# Altium PCB ANN.PcbDoc
Units mil, origin at the board's own origin, x right, y up, seen from the top; angles counter-clockwise.
Board outline 4785 x 5445 mil, 2 copper layers (Top Layer, Bottom Layer); 37 components, 36 nets, 145 pads, 0 vias.
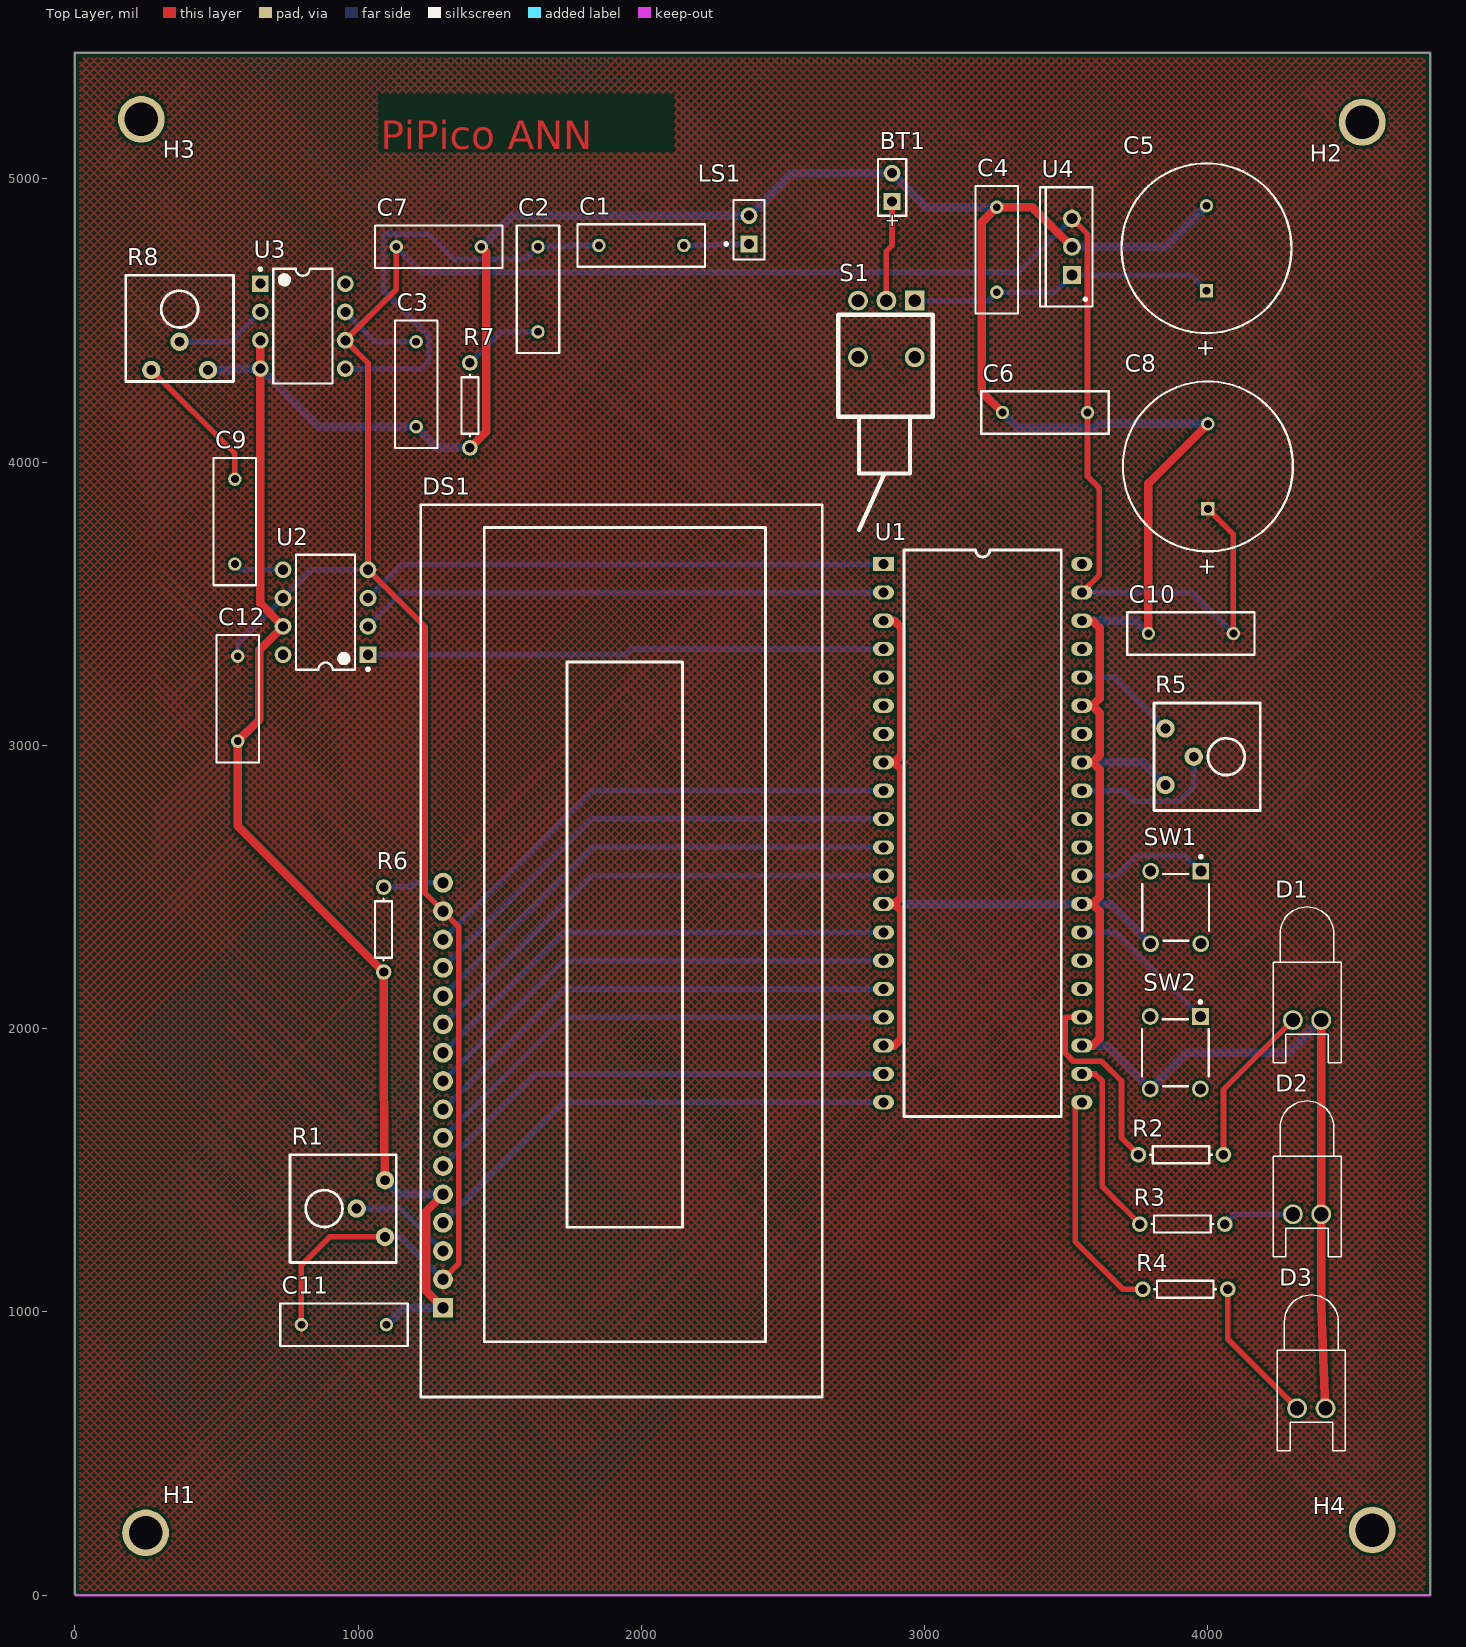
[diagram p0: Top Layer view]
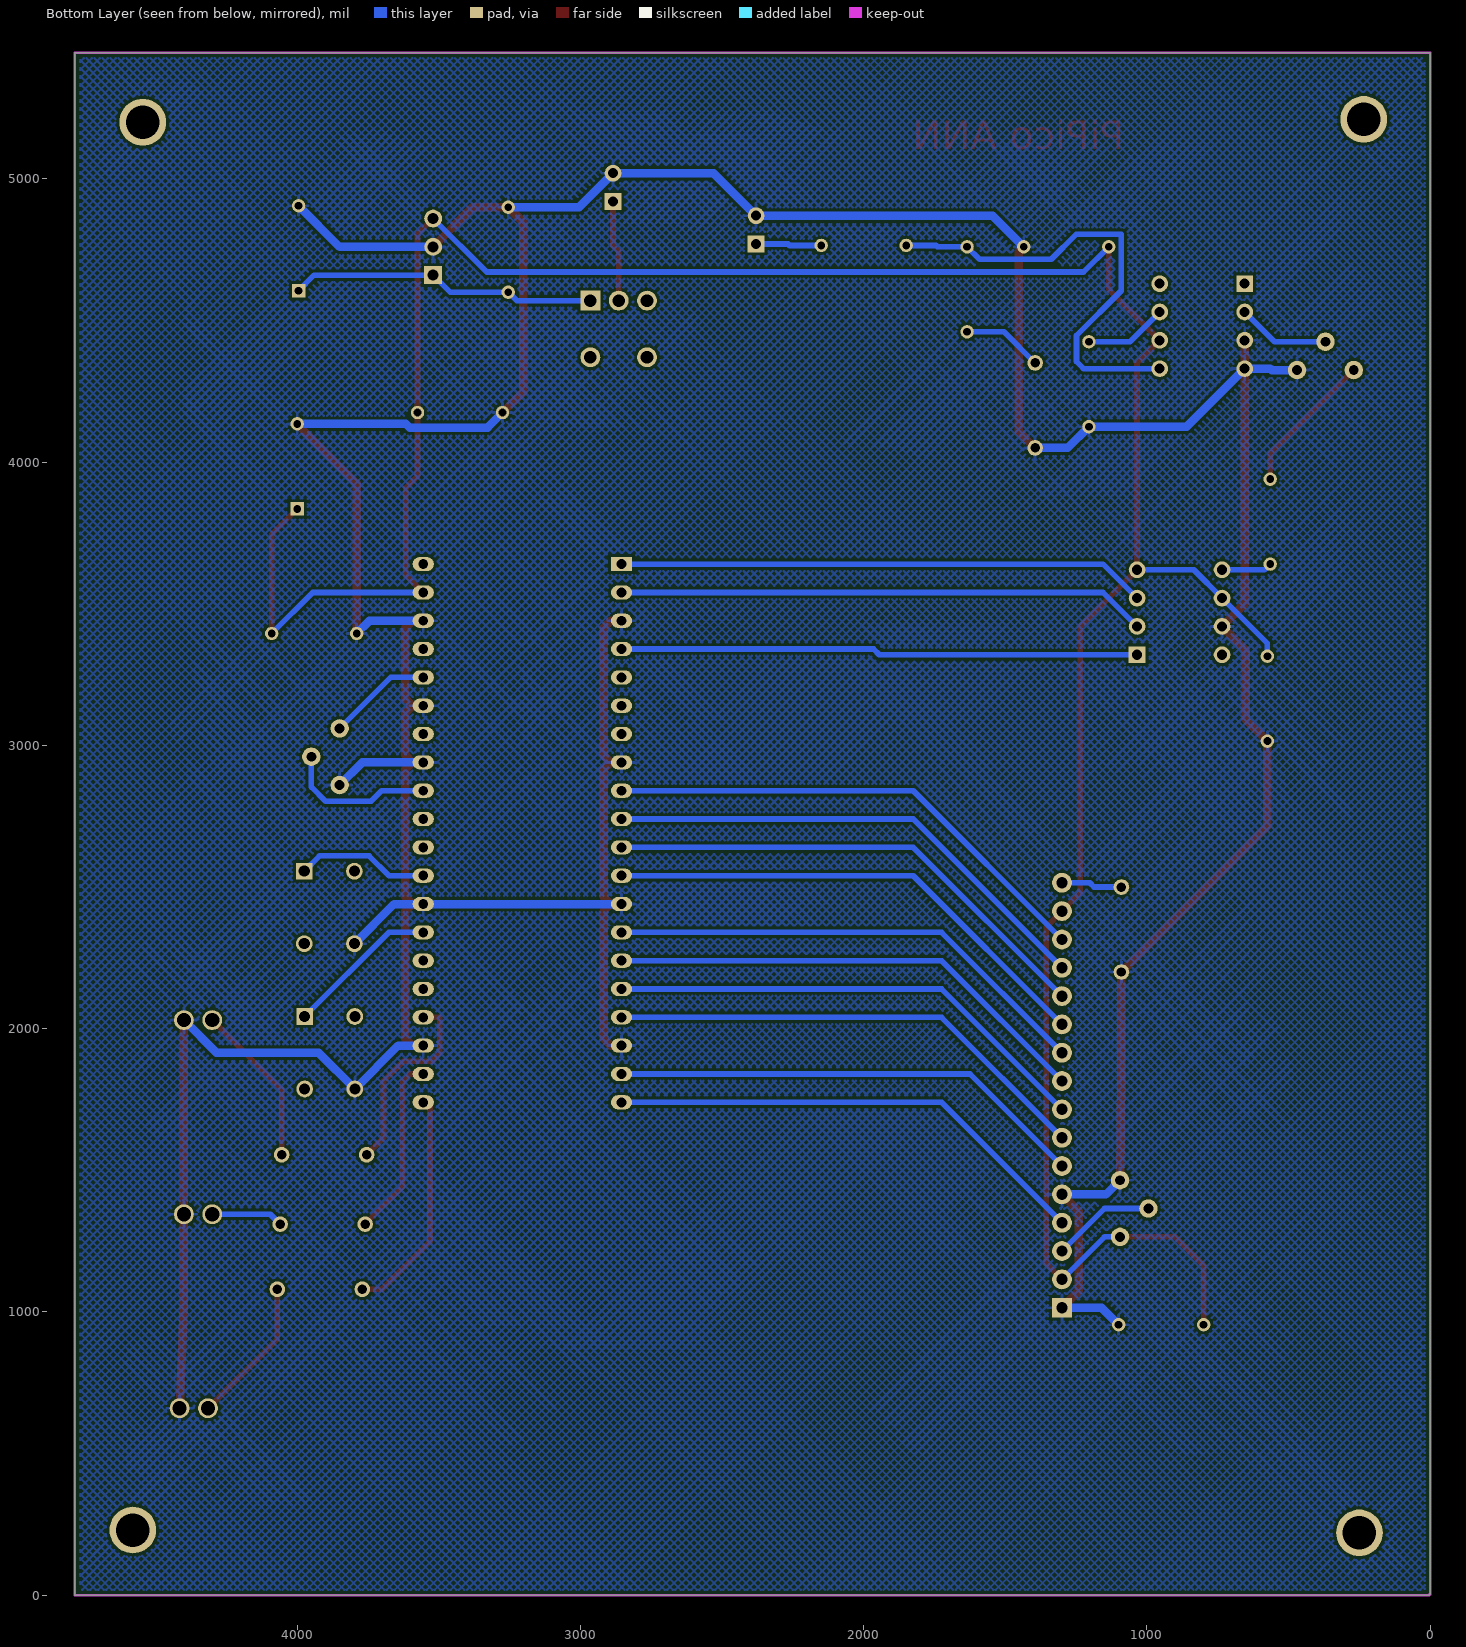
[diagram p1: Bottom Layer view, seen from below]

## Layer stack, top to bottom
Top Solder: solder mask 0.4, Solder Resist, Dk 3.5
Top Layer: signal copper 1.4
Dielectric 1: dielectric 12.6, FR-4, Dk 4.8
Bottom Layer: signal copper 1.4
Bottom Solder: solder mask 0.4, Solder Resist, Dk 3.5

## Board outline
0,215 0,330 0,5445 4785,5445 4785,0 5,0 0,5

## Design rules (kind name [scope] priority, off if disabled: settings)
Clearance [All] p1: gap=10 ignorepadtopadclearanceinfootprint=FALSE except(0: Arc-Hole Track-Hole SMDPad-Hole THPad-Hole Via-Hole Fill-Hole Poly-Hole Region-Hole Text-Hole)
PolygonConnect [All] p1: connectstyle=Relief reliefconductorwidth=10 reliefentries=4 polygonreliefangle="90 Angle" airgapwidth=10
RoutingVias [All] p1: holewidth=28 width=50 viastyle="Through Hole" minholewidth=28 minwidth=50 maxholewidth=28 maxwidth=50
SolderMaskExpansion [All] p1: expansion=4 istentingtop=FALSE
Width "Schematic Width Constraint" [InNet('GND')] p1: maxlimit=30 minlimit=30 preferedwidth=30
Width [All] p2: maxlimit=20 minlimit=20 preferedwidth=20
30 further rules are at their usual default settings.

## Components (designator, comment, footprint, x,y, rotation, side; value= is the part's Value field where it differs from the comment)
BT1 "Battery" BAT-2 2885,4970 r90 top
C1 "Cap" RAD-0.3 2000,4765 r180 top value=250uF
C2 "Cap" RAD-0.3 1635,4610 r90 top value=.05uF
C3 "Cap" RAD-0.3 1205,4275 r90 top value=10uF
C4 "Cap" RAD-0.3 3255,4750 r270 top value=100nF
C5 "Cap Pol1" RB7.6-15 3995,4755 r270 top value=100uF
C6 "Cap" RAD-0.3 3425,4175 r0 top value=100nF
C7 "Cap" RAD-0.3 1285,4760 r180 top value=100nF
C8 "Cap Pol1" RB7.6-15 4000,3985 r270 top value=100uF
C9 "Cap" RAD-0.3 565,3790 r90 top value=0.1uF
C10 "Cap" RAD-0.3 3940,3395 r0 top value=100nF
C11 "Cap" RAD-0.3 950,955 r180 top value=100nF
C12 "Cap" RAD-0.3 575,3165 r90 top value=100nF
D1 "RED" LED-0 4350,2030 r180 top
D2 "GREEN" LED-0 4350,1345 r180 top
D3 "YELLOW" LED-0 4365,660 r180 top
DS1 "LCD 44780" "OLED 16x2" 1300,1015 r90 top
H1 "Hole 3mm" "Hole 3mm" 250,220 r0 top
H2 "Hole 3mm" "Hole 3mm" 4545,5200 r0 top
H3 "Hole 3mm" "Hole 3mm" 235,5210 r0 top
H4 "Hole 3mm" "Hole 3mm" 4580,230 r0 top
LS1 "Speaker" PIN2 2380,4770 r90 top
R1 "RPot_2" "POT OFFSET 100_1" 1095,1265 r90 top value=10K
R2 "Res1" AXIAL-0.3 3905,1555 r0 top value=330
R3 "Res1" AXIAL-0.3 3910,1310 r0 top value=330
R4 "Res1" AXIAL-0.3 3920,1080 r0 top value=330
R5 "RPot_2" "POT OFFSET 100_1" 3850,3060 r270 top value=10K
R6 "Res1" AXIAL-0.3 1090,2350 r270 top value=1000
R7 "Res1" AXIAL-0.3 1395,4200 r90 top value=10
R8 "RPot_2" "POT OFFSET 100_1" 270,4325 r0 top value=10K
S1 "SW-SPDT" "SW DPST jameco" 2867.36,4571.89 r0 top
SW1 "1825910-6" TECO-1825910-6_V 3886.42,2427.95 r270 top
SW2 "1825910-6" TECO-1825910-6_V 3885,1915 r270 top
U1 "Raspberry Pi Pico" "Raspberry Pi Pico" 2855,3640 r0 top
U2 "LT1661" DIP-8 885,3470 r180 top
U3 "LM386N-1" DIP-8 805,4480 r0 top
U4 "LM2940CT-5.0" T03B 3520,4760 r90 top

## Footprints (in the part's own frame and the unit in brackets; to place one, negate y for a bottom-side part, rotate by r counter-clockwise, add the part's x,y. Pads: shape width x height; smd on the part's side, far side on the other; paste and mask are expansions set on the pad)
AXIAL-0.3 [mm] "Axial Device, Thru-Hole; 2 Leads; 0.3 in Pin Spacing"
  round 1.4 hole 0.85: 1(-3.81,0) 2(3.81,0)
  silkscreen extent -2.77,-0.76 2.77,0.76
BAT-2 [mm] "Battery; 2 Leads"
  rect 1.5x1.5 hole 0.9: 1(-1.27,0)
  round 1.5 hole 0.9: 2(1.27,0)
  silkscreen extent -2.54,-1.27 2.54,1.27
DIP-8 [mm]
  rect 1.5x1.5 hole 0.9: 1(-3.81,3.81)
  round 1.5 hole 0.9: 2(-3.81,1.27) 3(-3.81,-1.27) 4(-3.81,-3.81) 5(3.81,-3.81) 6(3.81,-1.27) 7(3.81,1.27) 8(3.81,3.81)
  silkscreen extent -3.94,-5.15 2.65,5.23, body extent -3.6,-5.15 3.6,5.15, height 5.08
"Hole 3mm" [mil]
  round 165 hole 118.11: 1(0,0)
LED-0 [mil] "LED; 2 Leads"
  round 70 hole 50: 1(50,0) 2(-50,0)
  silkscreen extent -120,-400 120,150
"OLED 16x2" [mil]
  rect 70x70 hole 40: 1(0,0)
  round 70 hole 40: 2(100,0) 3(200,0) 4(300,0) 5(400,0) 6(500,0) 7(600,0) 8(700,0) 9(800,0) 10(900,0) 11(1000,0) 12(1100,0) 13(1200,0) 14(1300,0) 15(1400,0) 16(1500,0)
  silkscreen extent -315,-1339 2835,79
PIN2 [mm] "Photosensitive Diode; 2 Leads"
  rect 1.5x1.5 hole 0.9: 1(0,0)
  round 1.5 hole 0.9: 2(2.54,0)
  silkscreen extent -1.4,-1.4 3.94,2.17
"POT OFFSET 100_1" [mil]
  round 65 hole 35: 1(0,0) 2(100,100) 3(200,0)
  silkscreen extent -90,-40 290,335
RAD-0.3 [mm] "Radial Cap, Thru-Hole; 2 Leads; 0.3 in Pin Spacing"
  round 1.2 hole 0.7: 1(-3.81,0) 2(3.81,0)
  silkscreen extent -5.71,-1.91 5.71,1.91
"Raspberry Pi Pico" [mil]
  rect 75x50 hole 35: 1(0,0)
  oval 75x50 hole 35: 2(0,-100) 3(0,-200) 4(0,-300) 5(0,-400) 6(0,-500) 7(0,-600) 8(0,-700) 9(0,-800) 10(0,-900) 11(0,-1000) 12(0,-1100) 13(0,-1200) 14(0,-1300) 15(0,-1400) 16(0,-1500) 17(0,-1600) 18(0,-1700) 19(0,-1800) 20(0,-1900) 21(700,-1900) 22(700,-1800) 23(700,-1700) 24(700,-1600) 25(700,-1500) 26(700,-1400) 27(700,-1300) 28(700,-1200) 29(700,-1100) 30(700,-1000) 31(700,-900) 32(700,-800) 33(700,-700) 34(700,-600) 35(700,-500) 36(700,-400) 37(700,-300) 38(700,-200) 39(700,-100) 40(700,0)
  silkscreen extent 72,-1950 628,50
RB7.6-15 [mm] "Polarized Capacitor (Radial); 2 Leads"
  rect 1.2x1.2 hole 0.7: 1(3.81,0)
  round 1.2 hole 0.7: 2(-3.81,0)
  silkscreen extent -7.62,-7.62 7.62,7.62
"SW DPST jameco" [mil]
  rect 70x70 hole 45: 1(97.64,-1.89)
  round 70 hole 45: 2(-2.36,-1.89) 3(-102.36,-1.89) 4(-102.36,-201.89) 5(97.64,-201.89)
  silkscreen extent -172,-812 162,-52
T03B [mm]
  rect 1.6x1.6 hole 1: 1(-2.54,0)
  round 1.6 hole 1: 2(0,0) 3(2.54,0)
  silkscreen extent -5.35,-1.85 5.35,2.85, body extent -5.4,-1.9 5.4,2.9, height 19.4
TECO-1825910-6_V [mm] "Switch, 4-Leads, Body 5.99x5.99mm"
  rect 1.5x1.5 hole 0.99: 1(-3.25,2.25)
  round 1.5 hole 0.99: 2(3.25,2.25) 3(-3.25,-2.25) 4(3.25,-2.25)
  silkscreen extent -4.67,-2.99 2.99,2.99, body extent -3,-2.99 2.99,3, height 5

## Part data
BT1: "Multicell Battery", LatestRevisionDate=17-Jul-2002, LatestRevisionNote="Re-released for DXP Platform.", PackageDescription="Battery; 2 Leads", PackageReference=BAT-2, Published=24-Mar-1999, Publisher="Altium Limited"
C1 C2 C3 C4 C6 C7 C9 C10 C11 C12: "Capacitor", LatestRevisionDate=17-Jul-2002, LatestRevisionNote="Re-released for DXP Platform.", PackageDescription="Radial Cap, Thru-Hole; 2 Leads; 0.3 in Pin Spacing", PackageReference=RAD-0.3, Published=8-Jun-2000, Publisher="Altium Limited"
C5 C8: "Polarized Capacitor (Radial)", LatestRevisionDate=17-Jul-2002, LatestRevisionNote="Re-released for DXP Platform.", PackageDescription="Polarized Capacitor (Radial); 2 Leads", PackageReference=RB7.6-15, Published=8-Jun-2000, Publisher="Altium Limited"
D1 D2 D3: library part LED0, "Typical INFRARED GaAs LED", LatestRevisionDate=08-Jul-2005, LatestRevisionNote="Mech Layer 1 removed.", PackageDescription="LED; 2 Leads", PackageReference=LED-0, Published=8-Jun-2000, Publisher="Altium Limited"
LS1: "Loudspeaker", LatestRevisionDate=17-Jul-2002, LatestRevisionNote="Re-released for DXP Platform.", PackageReference=PIN2, Published=24-Mar-1999, Publisher="Altium Limited"
R1 R5 R8: library part RPot_5, "Potentiometer", LatestRevisionDate=17-Jul-2002, LatestRevisionNote="Re-released for DXP Platform.", PackageDescription="Variable Resistor, Thru-Hole; 3 Leads", PackageReference=VR5, Published=8-Jun-2000, Publisher="Altium Limited", Set Position=0.5, Sim Note="Enter the Resistance value and the set point into parameter fields."
R2 R3 R4 R6 R7: "Resistor", LatestRevisionDate=17-Jul-2002, LatestRevisionNote="Re-released for DXP Platform.", PackageDescription="Axial Device, Thru-Hole; 2 Leads; 0.3 in Pin Spacing", PackageReference=AXIAL-0.3, Published=8-Jun-2000, Publisher="Altium Limited"
S1: "SPDT Subminiature Toggle Switch, Right Angle Mounting, Vertical Actuation", ComponentLink1Description="Manufacturer Link", ComponentLink1URL=http://www.apem.com, DatasheetVersion=05-Dec-2000, LatestRevisionDate=17-Dec-2003, LatestRevisionNote="Schematic revised, PCB Footprint replaced.", PackageDescription="Switch; 4 Leads", PackageReference=TL36WW15050, Published=24-Mar-1999, Publisher="Altium Limited"
SW1 SW2: library part CMP-1684-00021-1, "Tact Switch, SPST-NO, 0.05 A, -35 to 85 degC, 4-Pin THD, RoHS, Bulk", Actuator Color=Black, Contact Rating @ Voltage=0.05A@24VDC, Dielectric Strength=500VAC, Manufacturer="TE Connectivity", Maximum AC Voltage Rating=N/A, Maximum Contact Resistance=100mOhm, Maximum DC Voltage Rating=24V, Minimum Insulation Resistance=100MOhm, Operating Temperature=-35to85C, Package Description="4-Pin Through Hole Device, Body 5.99 x 5.99 mm, Pitch 6.5 mm", Package Reference=THD, Actuator Length=1.4mm, Actuator Material=PolybutyleneTerephthalate, Actuator Style=RoundButton, Base Material=N/A, Body Orientation=Straight, Bushing Type=Unthreaded, Contact Material=CopperAlloy, Contact Plating=Silver, Datasheet URL=http://www.te.com/commerce/DocumentDelivery/DDEController?Action=showdoc&DocId=Customer+Drawing%7F1825910%7FC9%7Fpdf%7FEnglish%7FENG_CD_1825910_C9.pdf%7F1825910-6, Datasheet Version="Rev. C9", Dimension=5.99x5mm, Electrical Life=100000Cycles, Family=1825910, Function=MomentaryContact, Housing Material=N/A, Illumination=N/R, Manufacturer URL=http://www.te.com, Mechanical Life=100000Cycles, Mounting=ThroughHole, Packaging=N/A, Part No=1825910-6, Pole Throw Configuration=SPST, Product Weight=N/A, RoHS=Yes, Seal Description=N/A, Seal Location=N/A, Switch Configuration=OFF(ON), Terminal Type=PCPins, Thread Size=N/R
U3: "Low-Voltage Audio Power Amplifier", PackageDocument=Sep-1997, DatasheetDocument=Sep-1997, PackageReference=N08E, Published=15-Apr-2002, Publisher="Altium Limited"
U4: library part LM2940CT-5.0_1, "1A Low Dropout Regulator, 3-pin TO-220", Manufacturer="National Semiconductor", PackageTopMarking="NSUZXYTTE#*LM2940CT*-5.0 P+", PowerWise=N, ComponentLink1Description="Manufacturer URL", ComponentLink1URL=http://www.national.com/, ComponentLink2Description="LM2940C Datasheet", ComponentLink2URL=http://www.national.com/ds/LM/LM2940C.pdf, ComponentLink3Description="LM2940C Web Page", ComponentLink3URL=http://www.national.com/pf/LM/LM2940C.html, ComponentLink4Description="T03B Package Page", ComponentLink4URL=http://www.national.com/packaging/folders/t03b.html, CompType="LDO IC", DatasheetVersion=Jan-2007, High-Reliability=Y, PackageDescription="TO-220, Molded, 3 Lead, Straight", PackageReference=T03B, PackageVersion="revL, Jan-1992", PartNumber=LM2940CT-5.0, PinCount=3, RoHS=N

## Nets (pads, with @x,y where several pads share a name; then routed paths per layer and width w, separated by ;. In a path a pad name is that pad's centre, name@x,y a point inside that pad or via, vN(x,y) a via of type N, cw(c..) or ccw(c..) an arc to the next point about the centre after c; other vN are vias at no path point)
+5: C6.2 C7.2 C8.1 C10.2 C11.2 C12.2 DS1.2 DS1.15 R1.1 U1.39 U2.4 U2.6 U3.6 U4.3 | length 10292.6
  Top Layer w20: C11.2 800,1165 900,1265 R1.1 ; C7.2 1135,4610 U3.6 1035,4350 U2.4 1236,3419 1236,2479 DS1.15 1355,2360 1355,1170 DS1.2 ; U4.3 3575,4805 C6.2 3575,3950 3617,3908 3617,3602 U1.39 ; C8.1 4090,3745 C10.2
  Bottom Layer w20: C12.2 575,3360 U2.6 835,3620 U2.4 ; R1.1 1150,1265 DS1.2 ; C7.2 1224,4671 3331,4671 U4.3 ; U1.39 3945,3540 C10.2
AI1: R5.2 U1.32 | length 538
  Bottom Layer w20: U1.32 3702,2840 3739,2803 3900,2803 3950,2853 R5.2
DACCS: U1.4 U2.1 | length 1828.3
  Bottom Layer w20: U2.1 1945,3320 1965,3340 U1.4
DACDin: U1.1 U2.3 | length 1869.7
  Bottom Layer w20: U2.3 1155,3640 U1.1
DACSCK: U1.2 U2.2 | length 1869.7
  Bottom Layer w20: U2.2 1155,3540 U1.2
DI1: SW1.1 U1.29 | length 471.4
  Bottom Layer w20: U1.29 3676,2540 3746,2610 3920.91,2610 SW1.1
DI2: SW2.1 U1.27 | length 541.6
  Bottom Layer w20: U1.27 3676.53,2340 SW2.1
DO1: R2.1 U1.24 | length 708.4
  Top Layer w20: U1.24 3497,2040 3497,1913 3525,1885 3625,1885 3695,1815 3695,1615 R2.1
DO2: R3.1 U1.22 | length 642.4
  Top Layer w20: U1.22 3602,1840 3627,1815 3627,1443 R3.1
DO3: R4.1 U1.21 | length 823.6
  Top Layer w20: U1.21 3531.25,1740 3531.25,1248.75 3700,1080 R4.1
GND: BT1.2 C3.1 C4.1 C5.2 C6.1 C7.1 C8.2 C10.1 C11.1 C12.1 D1.2 D2.2 D3.2 DS1.1 DS1.5 LS1.2 R1.3 R5.3 R6.2 R7.1 R8.3 SW1.4 SW2.4 U1.3 U1.8 U1.13 U1.18 U1.23 U1.28 U1.33 U1.35 U1.38 U2.7 U3.3 U3.4 U4.2 | length 18602.6
  Top Layer w30: U3.3 U3.4 655,3500 U2.7 652,3337 652,3092 C12.1 575,2715 R6.2 1090,1838 R1.3 ; DS1.1 1240,1075 1240,1355 DS1.5 ; R7.1 1452,4107 1452,4743 C7.1 ; U1.18 2893,1940 2918,1965 2918,2415 2893,2440 ; U1.13 2893,2440 ; U1.8 2893,2940 ; U1.3 2893,3440 2918,3415 2918,2965 2893,2940 ; C6.1 3202,4248 3202,4847 C4.1 3380,4900 U4.2 ; U1.23 3593,1940 3618,1965 3618,2415 3593,2440 ; U1.28 3593,2440 ; U1.33 3593,2940 ; U1.35 3593,3140 ; U1.38 3593,3440 3618,3415 3618,3165 3593,3140 ; C10.1 3790,3925 C8.2 ; D1.2 D2.2 4400,1018 D3.2 ; 2893,2440 2918,2465 2918,2915 2893,2940 ; 3593,2440 3618,2465 3618,2915 3593,2940 ; 3593,2940 3618,2965 3618,3115 3593,3140
  Bottom Layer w30: R8.3 560,4325 565,4330 U3.4 860,4125 C3.1 1280,4050 R7.1 ; R1.3 1145,1415 DS1.5 ; C11.1 1160,1015 DS1.1 ; C7.1 1545,4870 LS1.2 2530,5020 BT1.2 3005,4900 C4.1 ; U1.13 U1.28 3657.83,2440 SW1.4 ; C6.1 3328,4122 3603,4122 3616,4135 C8.2 ; U4.2 3850,4760 C5.2 ; U1.23 3643.47,1940 SW2.4 3924.37,1915 4285,1915 D1.2 ; U1.33 3770,2940 R5.3 ; U1.38 3745,3440 C10.1
LCDE: DS1.6 U1.19 | length 1689.6
  Bottom Layer w20: DS1.6 1625,1840 U1.19
LCDI0: DS1.7 U1.17 | length 1731
  Bottom Layer w20: DS1.7 1725,2040 U1.17
LCDI1: DS1.8 U1.16 | length 1731
  Bottom Layer w20: DS1.8 1725,2140 U1.16
LCDI2: DS1.9 U1.15 | length 1731
  Bottom Layer w20: DS1.9 1725,2240 U1.15
LCDI3: DS1.10 U1.14 | length 1731
  Bottom Layer w20: DS1.10 1725,2340 U1.14
LCDI4: DS1.11 U1.12 | length 1772.5
  Bottom Layer w20: DS1.11 1825,2540 U1.12
LCDI5: DS1.12 U1.11 | length 1772.5
  Bottom Layer w20: DS1.12 1825,2640 U1.11
LCDI6: DS1.13 U1.10 | length 1772.5
  Bottom Layer w20: DS1.13 1825,2740 U1.10
LCDI7: DS1.14 U1.9 | length 1772.5
  Bottom Layer w20: DS1.14 1825,2840 U1.9
LCDRS: DS1.4 U1.20 | length 1731
  Bottom Layer w20: DS1.4 1725,1740 U1.20
NetBT1_1: BT1.1 S1.2 | length 358.3
  Top Layer w20: S1.2 2865,4745 2885,4765 BT1.1
NetC1_1: C1.1 LS1.1 | length 232.1
  Bottom Layer w20: C1.1 2262,4765 2267,4770 LS1.1
NetC1_2: C1.2 C2.2 U3.5 | length 1634.5
  Bottom Layer w20: U3.5 1224,4330 1249,4355 1249,4447 1091,4605 1091,4804 1250,4804 1338,4716 1591,4716 C2.2 1740,4760 1745,4765 C1.2
NetC2_1: C2.1 R7.2 | length 285.6
  Bottom Layer w20: R7.2 1505,4460 C2.1
NetC3_2: C3.2 U3.7 | length 293.5
  Bottom Layer w20: U3.7 1060,4425 C3.2
NetC4_2: C4.2 C5.1 S1.1 U4.1 | length 1090.1
  Bottom Layer w20: S1.1 3225,4570 C4.2 3460,4600 U4.1 3940,4660 C5.1
NetC9_1: C9.1 U2.5 | length 178.3
  Bottom Layer w20: C9.1 585,3620 U2.5
NetC9_2: C9.2 R8.1 | length 507.2
  Top Layer w20: R8.1 565,4030 C9.2
NetD1_1: D1.1 R2.2 | length 576.5
  Top Layer w20: R2.2 4055,1785 D1.1
NetD2_1: D2.1 R3.2 | length 254.5
  Bottom Layer w20: R3.2 4095,1345 D2.1
NetD3_1: D3.1 R4.2 | length 521.5
  Top Layer w20: R4.2 4070,905 D3.1
NetDS1_3: DS1.3 R1.2 | length 367.1
  Bottom Layer w20: R1.2 1150,1365 DS1.3
NetDS1_16: DS1.16 R6.1 | length 216.2
  Bottom Layer w20: R6.1 1187,2500 1202,2515 DS1.16
NetR5_1: R5.1 U1.36 | length 369.6
  Bottom Layer w20: U1.36 3670,3240 R5.1
NetR8_2: R8.2 U3.2 | length 328.5
  Bottom Layer w20: R8.2 550,4425 U3.2
pads on no net: H1.1 H2.1 H3.1 H4.1 S1.3 S1.4 S1.5 SW1.2 SW1.3 SW2.2 SW2.3 U1.5 U1.6 U1.7 U1.25 U1.26 U1.30 U1.31 U1.34 U1.37 U1.40 U2.8 U3.1 U3.8

## Polygon pours and split planes (outlines as drawn)
GND on Bottom Layer "GND_L02_P000" (hatched 45Degree grid 20 track 8, pour order 0): 0,0 0,5445 4785,5445 4785,0
+5 on Top Layer "+5_L01_P001" (hatched 45Degree grid 20 track 8, pour order 1): 0,0 0,5445 4785,5445 4785,0

## Keep-outs
Keep-Out Layer:
  lines w10: 0,5 5,0 95,0 4785,0 4785,5445 4505,5445 0,5445 0,330 0,215 0,5

## Other copper
Top Layer:
  text "PiPico ANN" at 1080,5105 h100

## Text inside footprints (layer, text, board x,y; h text height)
BT1: Top Overlay "+" at 2907.72,4825.51 h45.28 r90
C5: Top Overlay "+" at 3965.99,4434.85 h59.06 r270
C8: Top Overlay "+" at 3970.99,3664.85 h59.06 r270